# Altium PCB 驱动.PcbDoc (part 1 of 3)
Units mm, origin at the board's own origin, x right, y up, seen from the top; angles counter-clockwise.
Board outline 185 x 120 mm, 2 copper layers (Top Layer, Bottom Layer); 132 components, 68 nets, 349 pads, 106 vias.
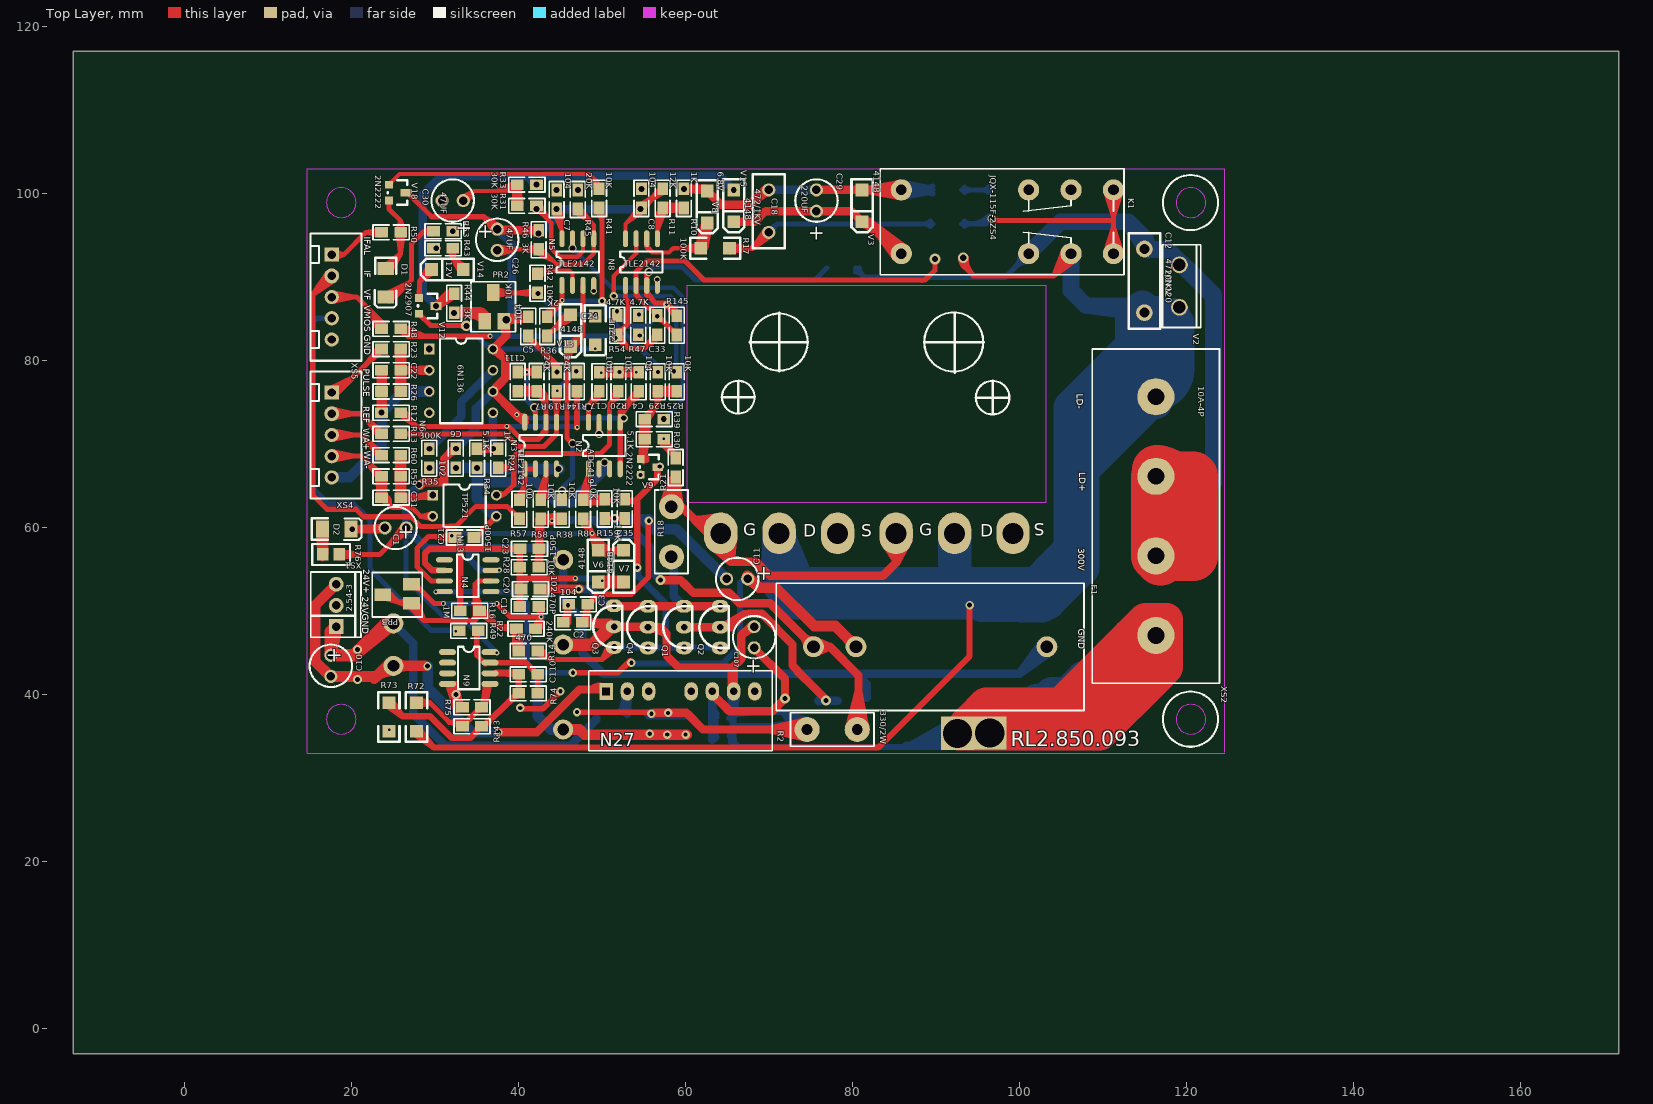
[diagram p0: Top Layer view]
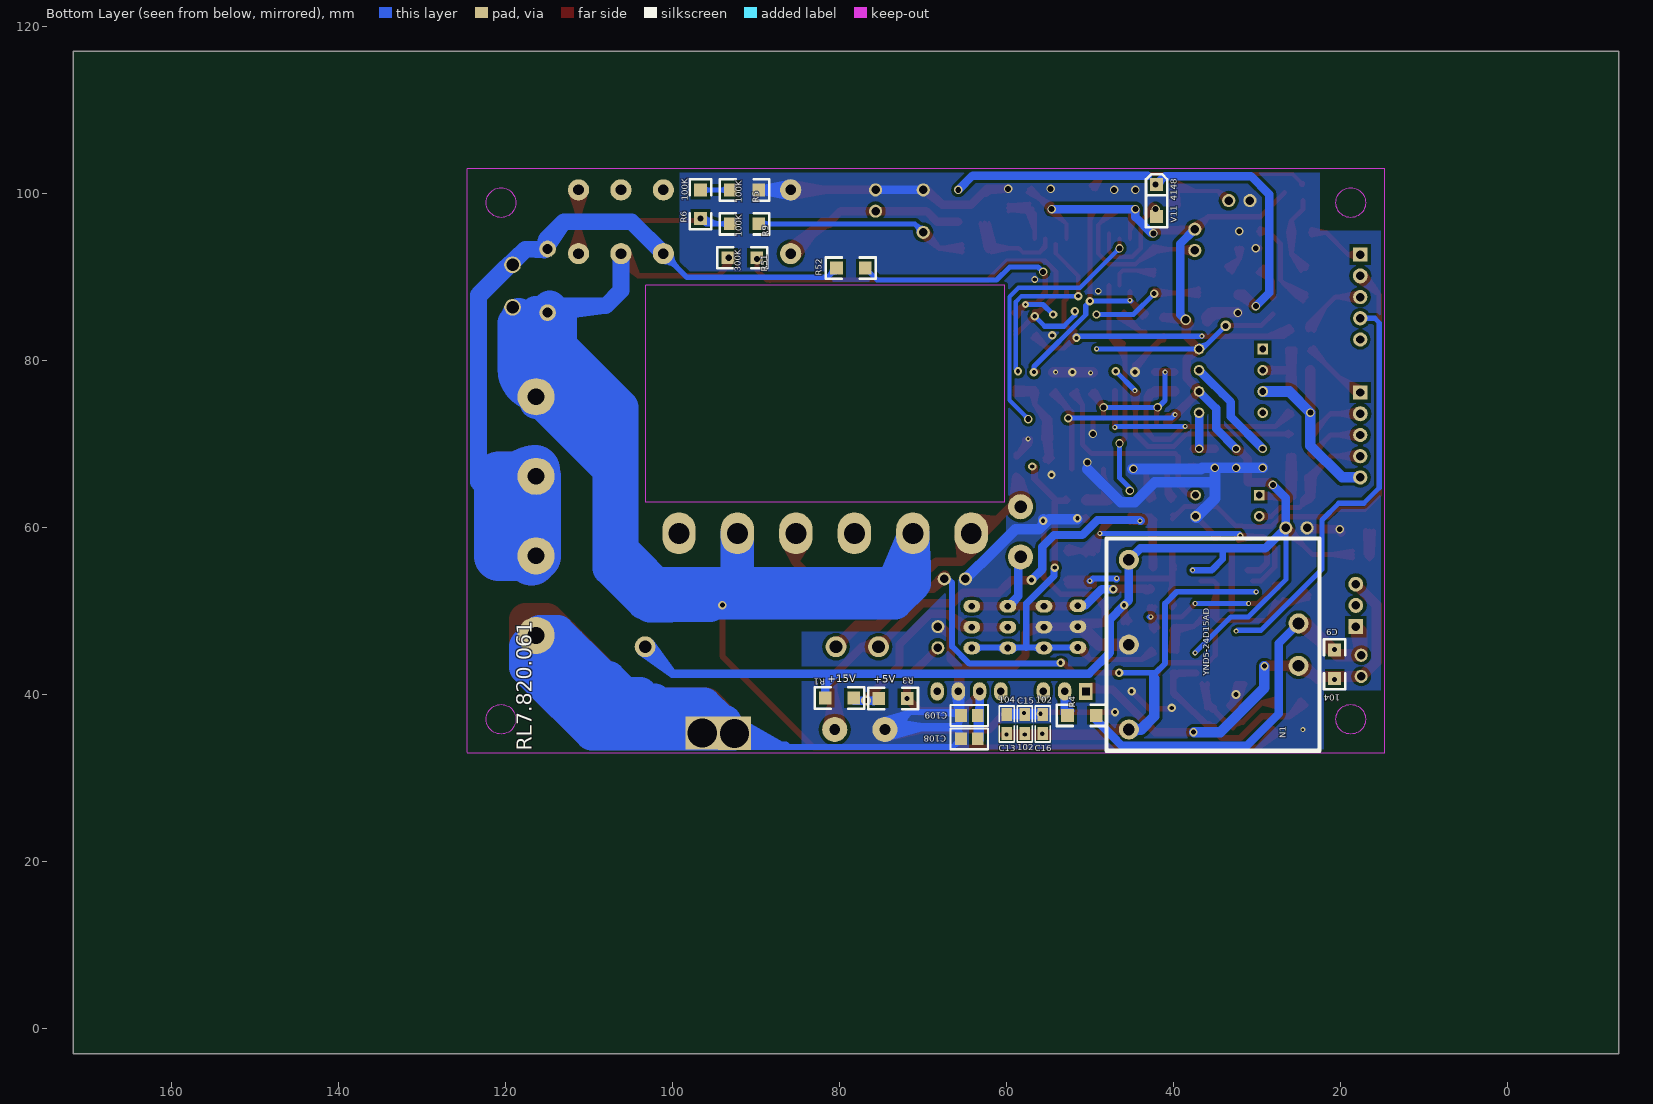
[diagram p1: Bottom Layer view, seen from below]

## Layer stack, top to bottom
Top Layer: signal copper 0.0356
Dielectric: dielectric 0.32, FR-4, Dk 4.8
Bottom Layer: signal copper 0.0356

## Board outline
-13.3,117 -13.3,-3 171.7,-3 171.7,117 -13.3,117

## Design rules (kind name [scope] priority, off if disabled: settings)
Clearance Clearance_1 [All vs (InPolygon)] p1: gap=0.381
Clearance [All] p2: gap=0.254
ComponentClearance [All] p1: gap=0 collisioncheckmode=3 verticalgap=0 showdistances=FALSE
FabricationTestPointUsage TestPointUsage [All] p1: valid=0 allowmultiple=FALSE
FabricationTestpoint Testpoint [All] p1: side=3 testpointundercomponent=TRUE minsize=1.016 maxsize=2.54 preferedsize=1.524 minholesize=0 maxholesize=1.016 preferedholesize=0.813 testpointgrid=0.025 allowsidetop=TRUE allowsidebottom=TRUE usegrid=TRUE gridtolerance=0
Height [All] p1: minheight=0 maxheight=100 prefheight=12.7
HoleSize [All] p1: absolutevalues=TRUE maxlimit=10 minlimit=0.025 maxpercent=80.000 minpercent=20.000
MinimumSolderMaskSliver [All] p1: minsoldermaskwidth=0
PolygonConnect [All] p1: connectstyle=Direct reliefconductorwidth=0.254 reliefentries=4 polygonreliefangle="90 Angle"
RoutingVias [All] p1: holewidth=0.711 width=1.016 viastyle="Through Hole" minholewidth=0.381 minwidth=0.508 maxholewidth=1.27 maxwidth=1.27
SilkToSilkClearance [All] p1: silktosilkclearance=0
SilkscreenOverComponentPads [All] p1: minsilkscreentomaskgap=0
SolderMaskExpansion [All] p1: expansion=0.102
Width [All] p1: maxlimit=25.4 minlimit=0.254 preferedwidth=25.4
20 further rules are at their usual default settings.

## Components (designator, comment, footprint, x,y, rotation, side; value= is the part's Value field where it differs from the comment)
C1 "100UF" RB.1/.2 26.543,59.944 r0 top
C2 "104" 0805A 45.339,48.641 r0 top
C3 "104" 0805A 45.989,50.792 r0 top
C4 "104" 0805A 54.367,76.3 r90 top
C5 "104" 0805A 41.148,85.217 r270 top
C6 "102" 0805A 32.485,69.427 r270 top
C7 "104" 0805A 44.55,98.129 r90 top
C8 "104" 0805A 54.71,98.256 r90 top
C9 "104" 1206#1 20.701,45.339 r270 bottom
C10 "47UF/35V" RB.1/.2 17.526,44.704 r90 top
C11 "100UF" RB.1/.2 64.897,53.848 r180 top
C12 "472/1KV" RAD0.3 114.935,93.345 r270 top
C13 "104" 0805A 59.962,37.621 r270 bottom
C15 "102" 0805A 57.803,37.621 r270 bottom
C16 "102" 0805A 55.644,37.621 r270 bottom
C17 "10U" 0805A 49.668,76.3 r90 top
C18 "472/1KV" RAD0.2 69.95,95.335 r90 top
C19 "470P" 0805A 42.418,50.546 r180 top
C20 "102" 0805A 42.568,52.632 r180 top
C21 "1500P" 0805A 32.385,58.801 r0 top
C22 "102" 0805A 23.595,78.825 r0 top
C23 "150P" 0805A 42.441,57.458 r180 top
C24 "22UF" 1206#2 50.546,80.518 r90 top
C26 "47UF" RB.1/.2 37.438,95.716 r90 top
C29 "220UF" RB.1/.2 75.665,97.875 r270 top
C30 "47UF" RB.1/.2 33.374,99.145 r0 top
C31 "103" 0805A 23.595,63.585 r0 top
C33 "102" 0805A 56.62,85.371 r270 top
C35 "100P" 0805A 52.705,61.087 r90 top
C107 "100UF" RB.1/.2 68.199,45.593 r270 top
C108 "102" 0805 63.427,34.695 r0 bottom
C109 "104" 0805 63.427,37.489 r0 bottom
C110 "102" 0805A 40.005,42.418 r0 top
C111 "104" 0805A 39.878,76.327 r90 top
D1 "LED" 1206A 24.103,91.017 r270 top
D2 "LED" 1206a 16.51,59.817 r0 top
F1 "2000/1" IF-1 89.281,57.15 r0 top
K1 "JQX-115F-2ZS4" JQX-115F 85.825,100.415 r0 top
N1 "YND5-24D15AD" YND5-D 25.019,48.514 r0 bottom
N2 "ADG419" SO-8#1 48.36,67.014 r90 top
N3 "TLE2142" SO-8#1 40.74,67.014 r90 top
N4 "TLE2141" SO-8#1 31.115,56.134 r0 top
N5 "TLE2142" SO-8#1 45.185,88.985 r90 top
N6 "6N136" DIP8 29.31,81.365 r0 top
N8 "TLE2142" SO-8#1 52.805,88.985 r90 top
N9 "TLE2142" SO-8#2 31.496,45.085 r0 top
N13 "TP521" DIP4 29.718,63.881 r0 top
N27 "WRB2405S" WRB2405S 48.387,33.274 r0 top
PR2 "10K" 3224#1 36.957,88.138 r180 top
PR3 "500K" 3224#2 23.749,51.943 r270 top
Q1 "2C2236" TO-92_2 59.817,48.071 r90 top
Q2 "2C2236" TO-92_2 64.135,48.071 r90 top
Q3 "A966" TO-92_2 51.435,48.133 r90 top
Q4 "A966" TO-92_2 55.499,48.071 r90 top
R1 "0Ω" 1206#2 83.058,38.227 r180 bottom
R2 "330/2W" 2W#1 74.549,35.814 r0 top
R3 "0Ω" 1206#2 70.485,40.894 r0 bottom
R4 "0Ω" 1206#2 47.879,38.862 r0 bottom
R5 "100K" 1206#1 89.635,100.415 r0 bottom
R6 "100K" 1206#1 96.62,100.415 r270 bottom
R7 "24K" 0805A 42.164,78.613 r270 top
R8 "10K" 0805A 47.725,61.045 r90 top
R9 "100K" 1206#1 89.635,96.351 r0 bottom
R10 "1K" 0805A 59.79,98.256 r90 top
R11 "12K" 0805A 57.25,98.256 r90 top
R12 "10K" 0805A 25.881,73.745 r180 top
R13 "10K" 0805A 25.881,71.205 r180 top
R14 "470" 0805A 42.291,45.212 r180 top
R15 "10K" 0805A 50.292,61.087 r90 top
R16 "1M" 0805A 35.306,50.038 r180 top
R17 "100K" 1206#1 61.822,93.43 r0 top
R18 "10/2W" 2W#2 58.293,62.484 r270 top
R19 "24K" 0805A 44.577,76.327 r90 top
R20 "10K" 0805A 51.954,78.586 r270 top
R21 "4.7K" 0805A 58.801,66.04 r90 top
R22 "240K" 0805A 39.751,47.879 r0 top
R23 "100" 0805A 25.881,81.365 r180 top
R24 "1K" 0805A 37.565,69.427 r270 top
R25 "10K" 0805A 58.939,78.586 r270 top
R26 "10K" 0805A 23.595,76.285 r0 top
R28 "10K" 0805A 42.418,55.245 r180 top
R29 "10K" 0805A 56.653,76.3 r90 top
R30 "5.1K" 0805A 55.091,70.57 r0 top
R31 "30K" 0805A 42.137,98.51 r180 top
R33 "30K" 0805A 39.851,101.05 r0 top
R34 "5.1K" 0805A 35.025,67.141 r90 top
R35 "300K" 0805A 29.31,67.141 r90 top
R36 "2K" 0805A 43.434,82.931 r90 top
R38 "10K" 0805A 45.185,63.331 r270 top
R39 "10K" 0805A 57.377,72.983 r180 top
R41 "10K" 0805A 49.63,100.542 r270 top
R42 "10K" 0805A 42.264,90.382 r270 top
R43 "300" 0805A 29.818,93.43 r0 top
R44 "3K" 0805A 32.274,87.985 r270 top
R45 "20K" 0805A 47.09,100.415 r270 top
R46 "3K" 0805A 42.391,95.589 r270 top
R47 "4.7K" 0805A 54.334,85.371 r270 top
R48 "100" 0805A 23.595,83.778 r0 top
R49 "100" 0805A 32.893,47.625 r0 top
R50 "510" 0805A 25.881,95.335 r180 top
R51 "300K" 1206#1 89.889,92.287 r0 bottom
R52 "300K" 1206#2 75.538,92.414 r0 bottom
R53 "3K" 0805A 32.104,95.462 r180 top
R54 "4.7K" 0805A 51.794,85.371 r270 top
R57 "100" 0805A 40.105,61.045 r90 top
R58 "10K" 0805A 42.645,63.331 r270 top
R59 "3K" 0805A 25.881,66.125 r180 top
R60 "510" 0805A 23.595,68.665 r0 top
R72 "300K" 1206#2 26.416,40.386 r270 top
R73 "300K" 1206#2 23.114,40.386 r270 top
R74 "30K" 0805A 40.005,40.132 r0 top
R75 "30K" 0805A 33.274,38.481 r0 top
R76 "2K" 0805 18.542,56.769 r180 top
R143 "10K" 0805A 33.274,36.195 r0 top
R144 "10K" 0805A 46.99,76.327 r90 top
R145 "10K" 0805A 58.928,85.344 r270 top
V2 "10N120" TO220D1 119.126,86.36 r270 top
V3 "4148" 1206-D 81.126,96.605 r270 top
V6 "4148" 1206-D 49.53,53.467 r270 top
V7 "4148" 1206-D 52.578,57.277 r90 top
V8 "6.8V" 1206-D 62.584,96.478 r270 top
V9 "2N2222" SOT-23 54.61,68.199 r270 top
V11 "4148" 1206-D 42.01,101.05 r90 bottom
V12 "2N2907" SOT-23 28.083,87.477 r270 top
V13 "4148" 1206-D 46.228,81.661 r270 top
V14 "12V" 1206-D 29.564,90.89 r180 top
V15 "4148" 1206-D 65.759,96.605 r270 top
V18 "2N2222" SOT-23 24.484,101.05 r270 top
XS1 "2.54-3" SIP3 18.161,48.133 r90 top
XS2 "10A-4P" XS10A-4P 116.305,75.65 r180 top
XS4 "Header 5" SIP-5 17.626,76.158 r270 top
XS5 "CON5" SIP-5 17.626,92.668 r270 top locked

## Footprints (in the part's own frame and the unit in brackets; to place one, negate y for a bottom-side part, rotate by r counter-clockwise, add the part's x,y. Pads: shape width x height; smd on the part's side, far side on the other; paste and mask are expansions set on the pad)
2W#1 [mm]
  round 3 hole 1.3: 0(0,0) 1(6,0)
  silkscreen extent -2,-2 8,2
2W#2 [mm]
  round 3 hole 1.5: 0(0,0) 1(6,0)
  silkscreen extent -2,-2 8,2
0805 [mm]
  rect 1.4x1.5 smd: 1(0,0) 2(2,0)
  silkscreen extent -1.25,-1.25 3.25,1.25
0805A [mil]
  rect 60x50 smd: 1(0,0) 2(90,0)
  silkscreen extent -40,-35 130,35
1206#1 [mil]
  rect 60x60 smd: 1(0,0) 2(135,0)
  silkscreen extent -50,-50 185,50
1206#2 [mil]
  rect 60x60 smd: 1(53.76,53.48) 2(188.76,53.48)
  silkscreen extent 4,3 239,103
1206-D [mm]
  rect 1.54x1.54 smd: A(-3.81,0) K(0,0)
  silkscreen extent -5.08,-1.27 1.27,1.27
1206A [mil]
  rect 60x78.74 smd: 1(0,0) 2(135,0)
  silkscreen extent -50,-52 184,50
1206a [mil]
  rect 60x78.74 smd: 1(0,0) 2(135,0)
  silkscreen extent -50,-52 184,50
3224#1 [mm]
  rect 1.5x2 smd: 1(1.016,3.429) 2(-1.27,3.429) W(0,0)
  silkscreen extent -2.67,-1.27 2.67,4.7
3224#2 [mm]
  rect 1.5x2 smd: 1(-1.27,3.429) 2(1.016,3.429) W(0,0)
  silkscreen extent -2.67,-1.27 2.67,4.7
DIP4 [mil]
  rect 50x50 hole 32: A(0,0)
  round 50 hole 32: C(300,0) E(300,-100) K(0,-100)
  silkscreen extent 50,-150 250,50
DIP8 [mil]
  rect 50x50 hole 32: 1(0,0)
  round 50 hole 32: 2(0,-100) 3(0,-200) 4(0,-300) 5(300,-300) 6(300,-200) 7(300,-100) 8(300,0)
  silkscreen extent 50,-350 250,50
IF-1 [mm]
  round 2.5 hole 1.524: 3(13.97,-11.43) 4(-13.97,-11.43) 5(-8.89,-11.43)
  silkscreen extent -18.41,-19.05 18.41,-3.81
JQX-115F [mm]
  round 2.54 hole 1.27: 0(15.24,0) 0(20.32,0) 0(25.4,-7.62) 1(20.32,-7.62) 2(25.4,0) 3(15.24,-7.62) 4(0,0) 5(0,-7.62)
  silkscreen extent -2.54,-10.16 26.67,2.54
RAD0.2 [mil]
  round 62 hole 40: 1(0,0) 2(200,0)
  silkscreen extent -75,-75 275,75
RAD0.3 [mm]
  round 2 hole 1.2: 1(0,0) 2(7.62,0)
  silkscreen extent -1.91,-1.91 9.53,1.91
RB.1/.2 [mil]
  round 62 hole 40: 1(0,0) 2(-100,0)
  silkscreen extent -150,-100 50,100
SIP3 [mil]
  rect 70x70 hole 40: 1(0,0)
  round 70 hole 40: 2(100,0) 3(200,0)
  silkscreen extent -50,-117 257,120
SIP-5 [mm]
  rect 1.7x1.7 hole 1: 1(0,0)
  round 1.8 hole 1: 2(2.54,0)
  round 1.7 hole 1: 3(5.08,0) 4(7.62,0) 5(10.16,0)
  silkscreen extent -2.54,-2.54 12.7,3.56
SO-8#1 [mil]
  oval 80x24 smd: 1(0,0) 2(0,-50) 3(0,-100) 4(0,-150) 5(220,-150) 6(220,-100) 7(220,-50) 8(220,0)
  silkscreen extent 60,-175 160,25
SO-8#2 [mil]
  oval 80x28 smd: 1(0,0) 2(0,-50) 3(0,-100) 4(0,-150) 5(200,-150) 6(200,-100) 7(200,-50) 8(200,0)
  silkscreen extent 50,-175 150,25
SOT-23 [mil]
  rect 36x36 smd: B(0,0) E(75,0)
  rect 36x50 smd: C(38,80)
  silkscreen extent -20,-5 95,85
TO220D1 [mm]
  round 2 hole 1.5: A(0,0) K(-5.08,0)
  silkscreen extent -7.49,-2.03 2.41,2.54
TO-92_2 [mm]
  oval 1.5x2 hole 0.8: 1(0,0) 2(-2.5,0) 3(2.5,0)
  silkscreen extent -2.5,-1 2.5,2.5
WRB2405S [mm]
  rect 1.6x2 hole 0.9 square: 1(2.1,7.1)
  oval 1.6x2.2 hole 0.9: 2(4.64,7.1) 3(7.18,7.1) 5(12.28,7.1) 6(14.82,7.1) 7(17.36,7.1) 8(19.89,7.1)
  silkscreen extent -0.01,0 21.99,9.6
XS10A-4P [mm]
  round 4.445 hole 2: 1(0,0) 2(0,9.525) 3(0,19.05) 4(0,28.575)
  silkscreen extent -7.62,-5.72 7.62,34.29
YND5-D [mm]
  round 2.4 hole 1.4: 1(0,0) 2(0,5.08) 3(20.32,12.7) 4(20.32,2.54) 5(20.32,-7.62)
  silkscreen extent -2.5,-10.17 23,15.23

## Part data
C1 C10 C11 C24 C26 C29 C30 C107: library part ELECTRO1
C2 C3 C4 C5 C6 C7 C8 C9 C12 C13 C15 C16 C17 C18 C19 C20 C21 C22 C23 C31 C33 C35 C108 C109 C110 C111: library part CAP
F1: library part IF-1
K1: library part RELAY-SPDT
N1: library part YND5
N3 N5 N8 N9: library part LM193
N4: library part TLC2241
N6: library part 6N137
N13: library part OPTOISO1
PR2 PR3: library part POT
Q1 Q2: library part 2N3904, "NPN General Purpose Amplifier"
Q3 Q4: library part 2N3906, "PNP General Purpose Amplifier"
R1 R2 R3 R4 R5 R6 R7 R8 R9 R10 R11 R12 R13 R14 R15 R16 R17 R18 R19 R20 R21 R22 R23 R24 R25 R26 R28 R29 R30 R31 R33 R34 R35 R36 R38 R39 R41 R42 R43 R44 R45 R46 R47 R48 R49 R50 R51 R52 R53 R54 R57 R58 R59 R60 R72 R73 R74 R75 R76 R143 R144 R145: library part RES2
V2 V3 V6 V7 V11 V13 V15: library part DIODE
V8 V14: library part "DIODE SCHOTTKY"
V9 V18: library part NPN1
V12: library part PNP2
XS1: library part CON3
XS2: library part CON4
XS4: "Header, 5-Pin"
XS5: "Connector"

## Free pads (board coordinates)
  rect 4x4 hole 3.5: 0(96.4,35.4) 1(92.55,35.35)
  oval 4x5 hole 2.5: 4(64.2,59.3) 5(71.2,59.3) 6(78.2,59.3) 7(85.2,59.3) 8(92.2,59.3) 9(99.2,59.3)

## Via types
v1: diameter 1.016, hole 0.711, Top Layer to Bottom Layer, 31 vias
v2: diameter 1, hole 0.5, Top Layer to Bottom Layer, 28 vias
v3: diameter 0.6, hole 0.3, Top Layer to Bottom Layer, 23 vias
v4: diameter 1, hole 0.6, Top Layer to Bottom Layer, 5 vias
v5: diameter 1.016, hole 0.635, Top Layer to Bottom Layer, 4 vias
v6: diameter 1.2, hole 0.6, Top Layer to Bottom Layer, 4 vias
v7: diameter 1.1, hole 0.6, Top Layer to Bottom Layer, 3 vias
v8: diameter 0.8, hole 0.4, Top Layer to Bottom Layer, 2 vias
v9: diameter 1.27, hole 0.762, Top Layer to Bottom Layer, 2 vias
v10: diameter 0.8, hole 0.5, Top Layer to Bottom Layer, 2 vias
v11: diameter 1.27, hole 0.889, Top Layer to Bottom Layer, 1 vias
v12: diameter 1.27, hole 0.711, Top Layer to Bottom Layer, 1 vias

## Nets (pads, with @x,y where several pads share a name; then routed paths per layer and width w, separated by ;. In a path a pad name is that pad's centre, name@x,y a point inside that pad or via, vN(x,y) a via of type N, cw(c..) or ccw(c..) an arc to the next point about the centre after c; other vN are vias at no path point)
24V: C9.1 C10.1 N1.1 R4.1 XS1.1 | length 68.4
  Top Layer w1.5: XS1.1@18.161,48.133 C10.1@17.526,44.704 ; XS1.1@18.2,48.2 17.526,47.526 C10.1@17.526,44.704 ; N1.1@25.019,48.514 20.304,44.704 ; N1.1@25.2,48.5 24.1,48.5 20.304,44.704 ; C10.1@17.526,44.704 20.304,44.704 ; 17.526,46.264 cw(c20.03,46.264) 18.259,48.035 ccw(c20.03,46.264) 17.526,46.264 ; 22.706,47.106 cw(c25.019,44.793) 25.019,48.064 ccw(c25.019,44.793) 22.706,47.106
  Bottom Layer w1: N1.1@25.019,48.514 27.4,46.133 27.4,37.695 31.236,33.86 46.148,33.86 47.293,35.005 47.305,35.005 49.3,37 R4.1@49.3,37.2
  other v7: 20.7,45.4
24V-: C9.2 C10.2 N1.2 N27.1 XS1.3 | length 74.2
  Top Layer w0.8: 48.7,40.6 cw(c49.746,39.554) N27.1@49.746,41.033 ; 49.459,40.6 cw(c49.459,39.546) N27.1@50.204,40.291 ; 49.5,40.6 50.1,40.6 N27.1@50.4,40.3 ; 49.584,40.6 ccw(c49.584,41.477) N27.1@50.204,40.857
  Top Layer w1: v4(37.6,35.5) 42.2,35.5 47.3,40.6 49.5,40.6
  Top Layer w1.27: C10.2@17.5,42.1 15.658,43.942 ; N1.2@25.6,43.6 24.4,43.6 22.964,42.164 ; v4@28.766,43.434 N1.2@25.019,43.434 22.964,42.164 ; 15.658,43.942 15.658,50.71 ; 15.658,43.942 C10.2@17.526,42.164 22.964,42.164 ; 15.658,50.71 XS1.3@18.161,53.213 15.658,50.71 ; 26.383,43.434 cw(c26.383,44.798) 25.419,43.834 ccw(c26.383,44.798) 26.383,43.434 ; 26.383,43.434 ccw(c26.383,42.07) 25.419,43.034 cw(c26.383,42.07) 26.383,43.434 ; 22.714,41.914 cw(c25.019,39.61) 25.019,42.869 ccw(c25.019,39.61) 22.714,41.914
  Bottom Layer w1.27: v4(29.1,43.4) 29.1,40.8 34.4,35.5 v4@37.5,35.5
  other v7: 20.7,41.8
300V: C12.1 K1.3 R52.2 V2.K XS2.2 XS2.3 | length 487.9
  Top Layer w6: XS2.3@116.305,56.6 120.75,66.125 ; XS2.3@116.305,56.6 120.75,56.6 ; XS2.3@116.305,56.6 120.75,56.6 ; XS2.3@116.305,56.6 XS2.2@116.94,66.125 ; XS2.3@116.305,56.6 XS2.2@116.305,66.125 ; XS2.3@116.305,56.6 XS2.2@116.305,66.125 ; XS2.2@116.305,66.125 120.75,66.125 ; XS2.2@116.305,66.125 120.75,56.6 ; XS2.2@116.305,66.125 XS2.3@116.94,56.6 ; XS2.2@116.305,66.125 120.75,66.125 ; XS2.2@116.305,66.125 120.75,66.125 ; XS2.3@116.855,56.05 ccw(c107.451,65.454) 120.75,65.454 ; XS2.3@116.855,56.05 ccw(c107.451,65.454) 120.75,65.454 ; XS2.3@116.855,56.05 ccw(c107.451,65.454) 120.75,65.454 ; XS2.2@116.855,66.675 cw(c107.451,57.271) 120.75,57.271 ; XS2.2@116.855,66.675 cw(c107.451,57.271) 120.75,57.271 ; XS2.2@116.855,66.675 cw(c107.451,57.271) 120.75,57.271 ; XS2.3@116.94,56.6 120.75,56.6 ; XS2.3@116.94,56.6 XS2.2@116.94,66.125 ; XS2.2@116.94,66.125 120.75,66.125 ; 120.75,56.6 120.75,66.125 ; XS2.2@116.453,66.888 cw(c115.445,61.68) 120.75,61.68 ccw(c115.445,61.68) XS2.2@116.453,66.888
  Bottom Layer w0.635: R52.2@80.332,91.056 81.438,89.95 98.22,89.95 K1.3@101.065,92.795 ; R52.2@80.332,90.611 cw(c80.332,89.538) R52.2@81.091,90.297 ; R52.2@80.332,90.611 cw(c80.332,89.538) R52.2@81.091,90.297 ; R52.2@80.332,90.611 cw(c80.332,89.538) R52.2@81.091,90.297 ; R52.2@80.777,91.056 ccw(c81.85,91.056) R52.2@81.091,90.297 ; R52.2@80.777,91.056 ccw(c81.85,91.056) R52.2@81.091,90.297 ; R52.2@80.777,91.056 ccw(c81.85,91.056) R52.2@81.091,90.297 ; 99.439,91.169 cw(c101.065,89.543) K1.3@101.065,91.842 ; 99.439,91.169 ccw(c97.813,92.795) K1.3@100.113,92.795 ; 99.439,91.169 cw(c101.065,89.543) K1.3@101.065,91.842 ; 99.439,91.169 ccw(c97.813,92.795) K1.3@100.113,92.795 ; 99.439,91.169 ccw(c97.813,92.795) K1.3@100.113,92.795 ; 99.439,91.169 cw(c101.065,89.543) K1.3@101.065,91.842
  Bottom Layer w2: K1.3@101.065,92.795 104.875,96.605 113.003,96.605 ; 120.75,62.95 123.2,65.4 123.2,87.874 119.888,91.186 117.6,93.3 ; 123.163,87.737 117.6,93.3 ; 113.003,96.605 115.1,94.508 ; 113.003,96.605 C12.1@115.316,93.218 ; 115.1,94.508 115.1,93.3 117.6,93.3 ; 115.1,94.508 C12.1@115.316,93.218 ; 115.1,94.508 C12.1@115.316,93.218 ; C12.1@115.316,93.218 ccw(c112.723,93.218) 114.557,95.051 cw(c112.723,93.218) C12.1@115.316,93.218 ; C12.1@115.316,93.218 ccw(c112.745,93.227) 114.563,95.045 cw(c112.745,93.227) C12.1@115.316,93.218 ; C12.1@115.316,93.218 117.6,93.3
  Bottom Layer w6: XS2.3@116.305,56.6 120.75,66.125 ; XS2.3@116.305,56.6 120.75,56.6 ; XS2.3@116.305,56.6 120.75,56.6 ; XS2.3@116.305,56.6 XS2.2@116.94,66.125 ; XS2.3@116.305,56.6 XS2.2@116.305,66.125 ; XS2.3@116.305,56.6 XS2.2@116.305,66.125 ; XS2.2@116.305,66.125 120.75,66.125 ; XS2.2@116.305,66.125 120.75,56.6 ; XS2.2@116.305,66.125 XS2.3@116.94,56.6 ; XS2.2@116.305,66.125 120.75,66.125 ; XS2.2@116.305,66.125 120.75,66.125 ; XS2.3@116.855,56.05 ccw(c107.451,65.454) 120.75,65.454 ; XS2.3@116.855,56.05 ccw(c107.451,65.454) 120.75,65.454 ; XS2.3@116.855,56.05 ccw(c107.451,65.454) 120.75,65.454 ; XS2.2@116.855,66.675 cw(c107.451,57.271) 120.75,57.271 ; XS2.2@116.855,66.675 cw(c107.451,57.271) 120.75,57.271 ; XS2.2@116.855,66.675 cw(c107.451,57.271) 120.75,57.271 ; XS2.3@116.94,56.6 120.75,56.6 ; XS2.3@116.94,56.6 XS2.2@116.94,66.125 ; XS2.2@116.94,66.125 120.75,66.125 ; 120.75,56.6 120.75,66.125 ; XS2.2@116.453,66.888 cw(c115.445,61.68) 120.75,61.68 ccw(c115.445,61.68) XS2.2@116.453,66.888
+5V: C107.1 C108.1 C109.1 N27.6 R3.1 | length 46.3
  Top Layer w1: N27.6@63.207,40.074 65.281,38 70.4,38 v6@71.8,39.4 ; N27.6@63.207,40.374 63.207,39.993 65,38.2 ; C107.1@68.199,45.593 71.9,41.892 v6(71.9,39.5)
  Bottom Layer w1.016: 63.207,36.226 N27.6@63.207,40.074 ; N27.6@63.207,40.374 63.207,34.593 63.427,37.439 63.427,34.745 63.207,38.514 C109.1@63.427,37.539 ; 63.207,35.74 ccw(c64.422,35.74) 63.563,34.881 cw(c64.422,35.74) 63.207,35.74 ; 63.207,36.444 cw(c64.422,36.444) 63.563,37.303 ccw(c64.422,36.444) 63.207,36.444 ; 63.207,38.534 ccw(c64.422,38.534) 63.563,37.675 cw(c64.422,38.534) 63.207,38.534
DGND: C22.1 N6.3 R12.2 R26.1 XS4.5 | length 44
  Top Layer w1.27: C22.1@23.595,78.19 v1(23.595,73.745) ; v1(23.595,73.745) C22.1@23.595,78.825 23.595,74.38 R26.1@23.595,76.285 ; v1(23.595,73.745) R26.1@23.595,76.285 ; v1(23.595,73.745) R26.1@23.595,76.285
  Bottom Layer w1.27: XS4.5@17.626,65.998 19.785,65.998 ; XS4.5@18.134,65.998 19.785,65.998 ; 19.785,65.998 23.595,69.808 v1(23.595,73.745) 26.135,76.285 ; 26.135,76.285 N6.3@29.31,76.285 26.135,76.285
GND: C1.2 C2.2 C3.2 C4.2 C5.2 C6.2 C7.2 C8.2 C11.1 C13.1 C15.1 C16.1 C17.2 C18.2 C21.2 C29.2 C30.2 C35.1 C107.2 C108.2 C109.2 D2.2 K1.4 N1.4 N2.2 N2.3 N2.7 N3.4 N5.4 N8.4 N9.4 N13.E N27.7 pad.0 pad.1 PR2.1 Q3.1 Q4.1 R2.0 R5.1 R10.2 R15.1 R19.2 R20.1 R21.2 R30.2 R34.1 R35.1 R43.1 R44.2 R45.1 R47.2 R53.1 R73.2 R75.1 V3.A V8.A V9.E XS2.4 | length 1521.8
  Top Layer w0.61: N2.7@49.63,71.891 v1(49.63,71.205) N2.7@49.63,72.602
  Top Layer w0.67: C21.2@34.7,58.9 34.897,58.9 N13.E@37.338,61.341 ; C21.2@34.798,58.801 36.809,60.812 ; v2@40.1,38.3 42.9,38.3 v2(45,40.4) ; C5.2@41.148,82.804 43.204,80.875 ; C5.2@41.148,82.931 44.6,79.479 ; 42.719,81.36 R19.2@44.577,78.74 ; R19.2@44.6,78.7 44.6,79.479 ; v2(47,37.9) 55.7,37.9 v2(55.9,37.7) ; C2.2@47.54,48.853 ccw(c45.765,50.628) C3.2@48.275,50.628 ; C2.2@47.752,48.641 C3.2@48.275,50.792 ; C2.2@47.8,48.8 48.275,49.275 C3.2@48.275,50.792 ; C2.2@48.014,48.379 ccw(c47.383,49.01) C2.2@48.275,49.01 ; C3.2@48.063,50.58 cw(c47.551,50.068) 48.275,50.068 cw(c48.999,50.068) C3.2@48.487,50.58 ; C3.2@48.402,50.792 49.469,51.986 ; C3.2@48.702,50.792 cw(c49.733,50.792) 49.004,51.521 ; R15.1@50.292,61.087 C35.1@52.705,61.087 C35.1@52.713,61.087 ; R15.1@50.5,60.9 R15.1@50.647,60.9 ; R15.1@50.504,60.875 cw(c51.016,60.363) 51.016,61.087 cw(c51.016,61.811) R15.1@50.504,61.299 ; C35.1@52.493,60.875 ccw(c51.981,60.363) 51.981,61.087 ccw(c51.981,61.811) C35.1@52.493,61.299 ; v2@55.6,60.9 55.5,60.8 55.5,54.016 53.47,51.986 49.469,51.986 ; R30.2@57.142,70.647 ccw(c58.037,70.457) 57.39,69.81 ; R30.2@57.165,70.358 cw(c56.653,69.846) 57.377,69.846 cw(c58.101,69.846) R30.2@57.589,70.358 ; 57.377,69.812 cw(c57.963,69.812) R30.2@57.659,70.313 ; R30.2@57.797,70.508 ccw(c59.477,70.151) R21.2@58.263,68.937 ; R21.2@58.197,69.003 ccw(c58.801,69.608) R21.2@58.801,68.753 ; C107.2@68.033,47.967 C107.2@68.199,48.133 ; C21.2@35.31,59.313 cw(c34.798,59.825) 34.798,59.101 ccw(c34.798,59.825) C21.2@35.31,59.313 ; C21.2@35.31,59.313 ccw(c35.822,58.801) 35.098,58.801 cw(c35.822,58.801) C21.2@35.31,59.313 ; 36.826,60.829 cw(c37.338,60.317) 37.338,61.041 ccw(c37.338,60.317) 36.826,60.829 ; 36.826,60.829 ccw(c36.314,61.341) 37.038,61.341 cw(c36.314,61.341) 36.826,60.829 ; N13.E@37.338,61.341 35.282,59.285 N13.E@37.338,61.341 ; R19.2@44.577,78.74 44.6,79.479 ; R19.2@44.577,78.74 44.6,79.479 ; 44.6,79.479 cw(c43.893,79.479) 44.373,78.96 ccw(c43.893,79.479) 44.6,79.479 ; C3.2@48.275,50.792 49.469,51.986 ; 57.377,69.823 R30.2@57.377,70.57 57.377,69.823 ; 57.377,69.823 58.7,68.5 57.504,70.57 58.801,68.453 57.377,69.823 ; C5.2@41.148,82.504 cw(c41.148,81.473) 41.877,82.202 ccw(c41.148,81.473) C5.2@41.148,82.504 ; 44.6,79.409 ccw(c45.246,79.409) 44.789,78.952 cw(c45.246,79.409) 44.6,79.409
  Top Layer w0.7: N9.4@31.592,40.976 R75.1@33.147,38.481 ; 32.475,38.125 N9.4@32.475,41.275 ; 32.475,38.125 32.5,38.1 R75.1@33.147,38.481 ; 32.475,38.125 R75.1@33.147,38.481 ; 32.475,38.125 R75.1@33.147,38.481 ; N9.4@32.475,41.275 N9.4@31.496,41.275 32.475,38.237 R75.1@33.147,38.481 ; N9.4@32.475,41.275 R75.1@33.147,38.481 ; N9.4@32.152,41.271 cw(c31.374,40.492) 32.475,40.492 ccw(c31.374,40.492) N9.4@32.152,41.271 ; 32.475,39.101 ccw(c33.767,39.101) 32.854,38.188 cw(c33.767,39.101) 32.475,39.101 ; 32.475,40.791 ccw(c35.457,40.791) 33.349,38.683 cw(c35.457,40.791) 32.475,40.791
  Top Layer w1: 49.374,48.633 cw(c49.374,46.322) Q3.1@51.008,47.956 ; Q3.1@51.435,48.133 Q3.1@51.467,48.133 ; Q3.1@51.498,48.133 55.249,48.071 51.685,48.133 Q4.1@55.435,48.133 ; Q3.1@51.5,48.1 Q3.1@51.467,48.133 ; 54.496,48.133 cw(c54.496,47.318) Q4.1@55.072,47.894 ; Q4.1@55.499,48.071 56.929,48.071 ; Q4.1@55.567,48.133 Q3.1@51.467,48.133 ; Q4.1@55.839,47.838 cw(c56.404,46.367) 57.519,47.481 ; v2@56.1,37.7 56.2,37.8 60.1,37.8 ; 60.2,37.7 62.086,35.814 R2.0@74.549,35.814 ; N27.7@65.5,40.6 65.5,43.2 59.2,43.2 57.7,44.7 57.7,47.3 ; 65.5,41.995 ccw(c67.068,41.995) N27.7@65.959,40.886 ; N27.7@65.747,40.674 65.747,43.3 65.7,43.3 66.658,44.258 66.658,47.058 ; 66.913,47.313 cw(c68.199,46.027) C107.2@68.199,47.846 ; C107.2@67.8,48.2 66.658,47.058 ; C107.2@68.199,48.133 66.658,47.058 ; R2.0@73.842,35.107 ccw(c72.135,33.4) 72.135,35.814 ccw(c72.135,38.228) R2.0@73.842,36.521 ; R2.0@74.438,34.82 70.049,35.814 R2.0@74.438,36.808 ; Q3.1@50.967,48.633 48.275,48.633 51.185,48.133 47.752,48.641 Q3.1@50.967,48.633 ; Q3.1@50.967,48.633 Q3.1@51.467,48.133 ; Q4.1@55.749,48.071 57.7,47.3 ; Q4.1@55.749,48.071 56.929,48.071 ; Q4.1@55.749,48.071 56.929,48.071 ; 56.929,48.071 57.7,47.3
  Top Layer w1.016: D2.2@19.912,59.394 19.912,59.412 20.1,59.6 v5(20.1,59.8) ; D2.2@19.939,59.817 23.983,59.817 C1.2@24,59.8 ; D2.2@20.161,59.817 C1.2@24.003,59.944 ; R43.1@29.818,93.43 30.13,93.43 v5(30.15,93.45) ; C29.2@75.665,100.415 K1.4@85.825,100.415 ; K1.4@85.758,99.656 81.507,100.415 K1.4@85.758,101.174 ; 61.338,100.542 cw(c61.338,99.042) V8.A@62.399,100.103 ; 61.338,100.542 cw(c61.338,99.042) V8.A@62.399,100.103 ; 61.338,100.542 cw(c61.338,99.042) V8.A@62.399,100.103 ; V8.A@62.584,100.288 64.235,98.637 67.664,98.637 ; V8.A@62.584,100.288 62.33,100.542 v1(59.79,100.542) V8.A@62.584,100.288 ; 67.664,98.637 69.442,100.415 C18.2@69.95,100.415 67.664,98.637 ; 68.606,99.579 cw(c69.95,98.235) C18.2@69.95,100.136 ; 68.606,99.579 cw(c69.95,98.235) C18.2@69.95,100.136 ; 68.606,99.579 cw(c69.95,98.235) C18.2@69.95,100.136 ; 83.985,100.415 cw(c83.985,98.575) K1.4@85.286,99.876 ; 83.985,100.415 ccw(c83.985,102.255) K1.4@85.286,100.954 ; 83.985,100.415 cw(c83.985,98.575) K1.4@85.286,99.876 ; 83.985,100.415 ccw(c83.985,102.255) K1.4@85.286,100.954 ; 83.985,100.415 ccw(c83.985,102.255) K1.4@85.286,100.954 ; 83.985,100.415 cw(c83.985,98.575) K1.4@85.286,99.876 ; 23.022,59.817 ccw(c23.022,60.925) 23.805,60.142 cw(c23.022,60.925) 23.022,59.817
  Top Layer w1.27: v1(32.274,85.699) 35.339,85.75 ; R44.2@32.325,85.75 35.339,85.75 ; 34.493,85.75 cw(c34.493,83.496) PR2.1@36.087,85.09 ; 35.157,85.75 cw(c35.157,84.781) PR2.1@36.061,85.13 ; PR2.1@35.941,84.709 PR2.1@35.962,84.709 ; C17.2@49.668,78.586 R20.1@51.954,78.586 ; C17.2@49.714,78.586 R20.1@51.954,78.586 ; C4.2@54.367,78.586 R20.1@51.954,78.586 ; 35.339,85.75 35.941,84.959 35.339,85.75 ; 33.754,85.75 cw(c33.754,82.772) 35.86,84.878 ccw(c33.754,82.772) 33.754,85.75
  Top Layer w1.5: N1.4@45.339,45.974 48.874,45.974 ; Q3.1@51.185,48.133 48.874,45.974 ; Q3.1@51.335,48 50.9,48 48.874,45.974
  Top Layer w4: 115.035,40.725 ccw(c111.153,44.607) XS2.4@116.104,46.979 ; XS2.4@116.305,46.44 116.305,44.82 ; pad.1@92.55,35.35 95.92,38.82 ; pad.1@92.55,35.35 pad.1@92.705,35.295 ; pad.1@92.55,35.35 106.551,35.295 pad.0@96.4,35.4 ; pad.1@92.55,35.35 pad.0@96.4,35.4 ; pad.1@92.55,35.35 pad.0@96.4,35.4 ; pad.1@92.55,35.35 pad.0@96.4,35.4 ; pad.1@92.705,35.295 106.78,35.295 ; pad.1@92.705,35.295 pad.0@96.4,35.4 ; pad.1@92.705,35.295 pad.0@96.4,35.4 ; 95.92,38.82 104.875,38.82 ; 95.92,38.82 pad.0@96.4,35.4 ; 95.92,38.82 pad.0@96.4,35.4 ; pad.0@96.4,35.4 cw(c104.657,27.143) 104.657,38.82 ; pad.0@96.4,35.4 cw(c104.657,27.143) 104.657,38.82 ; pad.0@96.4,35.4 cw(c104.657,27.143) 104.657,38.82 ; pad.0@96.4,35.4 104.875,38.82 ; pad.0@96.4,35.4 106.78,35.295 ; 104.875,38.82 113.13,47.075 ; 104.875,38.82 XS2.4@116.305,47.075 ; 106.78,35.295 109.606,35.295 116.305,41.995 ; 106.78,35.295 116.305,44.82 ; 106.78,35.295 XS2.4@116.305,47.075 ; 110.505,44.45 cw(c116.305,38.65) XS2.4@116.305,46.852 ; 110.505,44.45 cw(c116.305,38.65) XS2.4@116.305,46.852 ; 110.505,44.45 cw(c116.305,38.65) XS2.4@116.305,46.852 ; 112.673,45.348 cw(c116.305,41.716) XS2.4@116.305,46.852 ; 112.673,45.348 cw(c116.305,41.716) XS2.4@116.305,46.852 ; 112.673,45.348 cw(c116.305,41.716) XS2.4@116.305,46.852 ; 113.13,47.075 115.035,48.98 117.575,48.98 117.575,43.265 ; 113.13,47.075 XS2.4@114.4,47.075 ; 113.13,47.075 XS2.4@116.305,47.075 ; 113.13,47.075 XS2.4@116.305,47.075 ; 113.13,47.075 XS2.4@116.305,47.075 ; 114.331,42.846 ccw(c110.102,47.075) XS2.4@116.083,47.075 ; 114.331,42.846 ccw(c110.102,47.075) XS2.4@116.083,47.075 ; 114.331,42.846 ccw(c110.102,47.075) XS2.4@116.083,47.075 ; XS2.4@114.4,47.075 106.78,39.455 XS2.4@116.305,47.075 ; XS2.4@114.4,47.075 XS2.4@116.305,47.075 ; XS2.4@116.148,46.918 cw(c112.702,43.472) 117.575,43.472 ; XS2.4@116.148,46.918 cw(c112.702,43.472) 117.575,43.472 ; XS2.4@116.148,46.918 cw(c112.702,43.472) 117.575,43.472 ; 116.305,41.995 116.305,44.82 ; 116.305,41.995 117.575,43.265 ; 116.305,41.995 XS2.4@116.305,47.075 ; 116.305,41.995 XS2.4@116.305,47.075 ; 116.305,44.82 XS2.4@116.305,47.075 ; XS2.4@116.305,47.075 117.575,43.265 ; XS2.4@116.305,47.075 117.575,43.265 ; 111.543,45.488 cw(c115.146,41.884) 116.257,46.858 ccw(c115.146,41.884) 111.543,45.488
  Bottom Layer w0.61: K1.4@85.806,100.06 R5.1@89.004,100.065 ; K1.4@85.806,100.77 R5.1@89.004,100.765 ; K1.4@85.845,100.06 R5.1@88.924,100.415 ; K1.4@85.845,100.77 R5.1@88.924,100.415 ; K1.4@85.865,99.451 R5.1@89.004,100.065 ; K1.4@85.865,101.379 R5.1@89.004,100.765 ; K1.4@85.884,100.064 R5.1@89.004,100.765 ; K1.4@85.884,100.766 R5.1@89.004,100.065 ; K1.4@85.975,99.462 R5.1@88.924,100.415 ; K1.4@85.975,101.368 R5.1@88.924,100.415 ; K1.4@86.074,99.483 R5.1@89.004,100.765 ; K1.4@86.074,101.347 R5.1@89.004,100.065 ; R5.1@89.595,99.96 87.044,100.415 R5.1@89.595,100.87 ; R5.1@89.635,100.415 K1.4@85.825,100.415 ; K1.4@85.825,100.415 R5.1@89.004,100.065 ; K1.4@85.825,100.415 R5.1@89.004,100.765 ; K1.4@86.508,99.732 cw(c88.155,98.085) 88.155,100.415 ; K1.4@86.508,99.732 cw(c88.155,98.085) 88.155,100.415 ; K1.4@86.508,99.732 cw(c88.155,98.085) 88.155,100.415 ; K1.4@86.508,101.097 ccw(c88.155,102.745) 88.155,100.415 ; K1.4@86.508,101.097 ccw(c88.155,102.745) 88.155,100.415 ; K1.4@86.508,101.097 ccw(c88.155,102.745) 88.155,100.415 ; 88.531,100.415 cw(c88.531,99.311) R5.1@89.312,100.092 ; 88.531,100.415 ccw(c88.531,101.519) R5.1@89.312,100.738 ; 88.531,100.415 cw(c88.531,99.311) R5.1@89.312,100.092 ; 88.531,100.415 ccw(c88.531,101.519) R5.1@89.312,100.738 ; 88.531,100.415 ccw(c88.531,101.519) R5.1@89.312,100.738 ; 88.531,100.415 cw(c88.531,99.311) R5.1@89.312,100.092
  Bottom Layer w0.7: N27.7@65.297,40.091 C109.2@65.427,37.539 ; N27.7@65.298,40.039 C109.2@65.747,37.174 ; C108.2@65.427,34.645 66.39,33.71 ; C108.2@65.427,34.745 65.747,36.1 ; C109.2@65.427,37.439 65.747,36.1 ; C108.2@65.5,34.6 C108.2@65.747,34.353 ; C108.2@65.747,34.695 65.747,36.1 ; C108.2@65.8,34.3 C108.2@65.747,34.353 ; C109.2@65.8,37.9 71.6,37.9 ; N27.7@66.187,39.979 C109.2@65.427,37.539 ; N27.7@66.196,40.039 C109.2@65.747,37.174 ; 68.39,37.9 C109.2@65.427,37.539 ; R2.0@73.744,34.993 71.6,37.9 ; R2.0@74.267,35.464 71.6,37.9 ; R2.0@74.5,35.8 73.7,35.8 71.6,37.9 ; R2.0@74.549,35.814 71.6,37.9 ; R2.0@74.785,36.197 71.6,37.9 ; R2.0@75.055,36.847 71.6,37.9 ; 86.6,33.85 86.46,33.71 66.39,33.71 ; C109.2@65.427,37.539 N27.7@65.747,40.374 65.747,36.1 ; C109.2@65.427,37.539 65.747,40.074 C109.2@65.747,37.174 ; C108.2@65.747,34.353 66.39,33.71 ; 65.747,36.1 cw(c64.392,36.1) 65.215,35.023 ccw(c64.392,36.1) 65.747,36.1 ; 65.747,38.988 cw(c66.833,38.988) 66.065,39.756 ccw(c66.833,38.988) 65.747,38.988 ; 65.747,38.988 ccw(c64.661,38.988) 65.429,39.756 cw(c64.661,38.988) 65.747,38.988 ; C109.2@65.18,37.786 ccw(c63.809,39.157) 65.747,39.157 cw(c63.809,39.157) C109.2@65.18,37.786 ; C109.2@65.211,37.164 cw(c64.348,36.062) 65.747,36.062 ccw(c64.348,36.062) C109.2@65.211,37.164 ; C108.2@65.427,34.295 cw(c65.427,33.382) 66.072,34.028 ccw(c65.427,33.382) C108.2@65.427,34.295 ; C109.2@65.674,37.292 cw(c67.144,35.822) 67.144,37.9 ccw(c67.144,35.822) C109.2@65.674,37.292 ; C108.2@65.777,34.645 ccw(c66.554,34.645) 66.005,34.095 cw(c66.554,34.645) C108.2@65.777,34.645 ; 72.032,37.468 ccw(c73.589,39.025) 74.22,36.916 cw(c73.589,39.025) 72.032,37.468 ; 72.861,36.639 ccw(c73.971,37.748) 74.42,36.245 cw(c73.971,37.748) 72.861,36.639
  Bottom Layer w1: 65.747,36.1 74.2,36.1 R2.0@74.5,35.8 ; R2.0@74.376,34.829 70.025,36.1 ; R2.0@74.502,36.813 70.025,36.1 ; R2.0@74.549,35.814 70.025,36.1 ; 71.444,36.1 cw(c71.444,32.709) 73.842,35.107 ccw(c71.444,32.709) 71.444,36.1 ; 72.825,36.1 ccw(c72.825,37.538) 73.842,36.521 cw(c72.825,37.538) 72.825,36.1
  Bottom Layer w1.016: C18.2@69.95,100.415 C29.2@75.665,100.415 ; 89.056,33.85 ccw(c89.056,42.744) pad.0@95.345,36.455 ; pad.1@91.509,33.85 ccw(c91.509,40.291) pad.0@96.063,35.737 ; pad.1@91.981,36.729 86.961,33.85 ; pad.1@92.673,35.327 pad.1@91.195,33.85 ; pad.1@92.748,33.871 86.961,33.85 ; pad.1@93.962,33.85 ccw(c93.962,37.838) pad.0@96.782,35.018 ; pad.0@95.558,34.168 pad.1@93.159,36.712 ; pad.0@95.643,36.686 pad.1@92.337,33.873 ; pad.0@95.778,36.756 pad.1@91.235,33.85 ; pad.0@96.092,36.86 pad.1@92.55,35.35 ; pad.0@96.13,33.933 pad.1@92.55,35.35 ; pad.0@96.627,33.925 pad.1@91.235,33.85 ; pad.0@96.652,36.871 pad.1@93.159,36.712 ; pad.0@96.677,33.934 pad.1@92.337,33.873 ; pad.0@96.705,33.94 99.7,35.327 ; pad.0@96.769,36.846 99.7,35.327 ; 86.6,33.85 ccw(c86.6,39.77) 91.352,36.24 cw(c86.6,39.77) 86.6,33.85 ; 86.6,33.85 pad.1@91.195,33.85 ; 86.961,33.85 pad.1@92.55,35.35 ; pad.1@91.195,33.85 ccw(c91.195,38.332) 95.1,36.132 cw(c91.195,38.332) pad.1@91.195,33.85 ; pad.1@91.195,33.85 pad.0@98.223,33.85 ; pad.1@91.235,33.85 pad.0@96.4,35.4 ; pad.1@92.104,35.045 ccw(c94.37,36.595) pad.1@94.37,33.85 ; pad.1@92.104,35.045 ccw(c94.37,36.595) pad.1@94.37,33.85 ; pad.1@92.104,35.045 ccw(c94.37,36.595) pad.1@94.37,33.85 ; pad.1@92.337,33.873 pad.0@97.736,33.85 ; pad.1@92.337,33.873 pad.0@96.4,35.4 ; pad.1@92.55,35.35 pad.0@97.736,33.85 ; pad.1@92.55,35.35 pad.0@96.4,35.4 ; pad.1@92.943,35.619 ccw(c96.296,37.913) pad.0@96.296,33.85 ; pad.1@92.943,35.619 ccw(c96.296,37.913) pad.0@96.296,33.85 ; pad.1@92.943,35.619 ccw(c96.296,37.913) pad.0@96.296,33.85 ; pad.1@93.159,36.712 pad.0@97.736,33.85 ; pad.1@93.159,36.712 pad.0@96.4,35.4 ; pad.1@93.781,36.192 ccw(c98.222,39.231) pad.0@98.222,33.85 ; pad.1@93.781,36.192 ccw(c98.222,39.231) pad.0@98.222,33.85 ; pad.1@93.781,36.192 ccw(c98.222,39.231) pad.0@98.222,33.85 ; pad.0@96.4,35.4 99.7,35.327 ; pad.0@98.223,33.85 99.7,35.327 ; 86.414,33.85 ccw(c86.414,40.146) 91.374,36.269 cw(c86.414,40.146) 86.414,33.85 ; 88.498,33.85 ccw(c88.498,38.517) 92.175,35.643 cw(c88.498,38.517) 88.498,33.85 ; 88.621,33.85 ccw(c88.621,38.269) 92.168,35.634 cw(c88.621,38.269) 88.621,33.85 ; pad.1@90.581,33.85 ccw(c90.581,36.889) 92.975,35.017 cw(c90.581,36.889) pad.1@90.581,33.85 ; pad.1@90.641,33.85 ccw(c90.641,36.768) 92.983,35.028 cw(c90.641,36.768) pad.1@90.641,33.85 ; pad.1@92.934,33.85 ccw(c92.934,37.353) 95.985,35.634 cw(c92.934,37.353) pad.1@92.934,33.85 ; pad.0@94.672,33.85 ccw(c94.672,36.373) 96.871,35.135 cw(c94.672,36.373) pad.0@94.672,33.85
  Bottom Layer w1.27: v1(29.31,67.141) v1(32.485,67.141) v1(35.025,67.141) ; v1@35.1,67.141 v1(35.025,67.141) ; N13.E@37.2,61.2 37.3,61.2 35.025,63.475 ; N13.E@37.338,61.341 35.025,63.475 ; v1@44.9,67 36.7,67 36.559,67.141 v1(35.025,67.141) ; 50.3,67 46.303,63.003 44.621,63.003 42.219,65.405 35.23,65.405 35.025,65.2 ; v2@51.5,61 54.9,61 v2@55.55,60.35 ; v2@55.55,61 v2@55.55,60.35 ; C16.1@55.644,37.621 C15.1@57.803,37.621 ; C13.1@59.679,37.621 C15.1@57.803,37.621 ; C13.1@59.962,37.621 C15.1@57.803,37.621 ; 61.396,57.304 C11.1@64.897,53.848 64.852,53.848 58.9,59.8 56.1,59.8 v2@55.55,60.35 ; 35.025,63.475 35.025,65.2 ; 35.025,65.2 v1(35.025,67.141)
  Bottom Layer w4: pad.1@93.73,36.752 cw(c93.73,33.44) pad.0@96.4,35.4 ; 98.997,36.752 ccw(c98.997,33.582) pad.0@96.4,35.4 ; 104.657,38.82 ccw(c104.657,27.143) pad.0@96.4,35.4 ; 115.035,40.725 ccw(c111.153,44.607) XS2.4@116.104,46.979 ; pad.1@92.55,35.35 cw(c95.936,31.964) pad.0@95.936,36.752 ; pad.1@92.55,35.35 cw(c95.936,31.964) pad.0@95.936,36.752 ; pad.1@92.55,35.35 cw(c95.936,31.964) pad.0@95.936,36.752 ; pad.1@92.55,35.35 pad.1@92.673,35.327 ; pad.1@92.55,35.35 99.7,35.327 ; pad.1@92.55,35.35 99.552,36.752 ; pad.1@92.55,35.35 96.165,38.82 ; pad.1@92.55,35.35 pad.0@96.4,35.4 ; pad.1@92.55,35.35 pad.0@96.4,35.4 ; pad.1@92.55,35.35 pad.0@96.4,35.4 ; pad.1@92.55,35.35 pad.0@96.4,35.4 ; pad.1@92.673,35.327 99.7,35.327 ; pad.1@92.673,35.327 pad.1@94.098,36.752 ; pad.1@92.673,35.327 pad.0@96.4,35.4 ; pad.1@92.673,35.327 pad.0@96.4,35.4 ; pad.1@92.673,35.327 pad.0@96.4,35.4 ; pad.1@94.098,36.752 cw(c94.098,34.116) pad.0@96.4,35.4 ; pad.1@94.098,36.752 cw(c94.098,34.116) pad.0@96.4,35.4 ; pad.1@94.098,36.752 99.552,36.752 ; pad.1@94.098,36.752 96.165,38.82 ; pad.1@94.098,36.752 pad.0@96.4,35.4 ; pad.1@94.098,36.752 pad.0@96.4,35.4 ; pad.1@94.098,36.752 pad.0@96.4,35.4 ; 96.165,38.82 101.62,38.82 ; 96.165,38.82 pad.0@96.4,35.4 ; 96.165,38.82 pad.0@96.4,35.4 ; 96.165,38.82 pad.0@96.4,35.4 ; pad.0@96.4,35.4 cw(c99.552,32.403) 99.552,36.752 ; pad.0@96.4,35.4 ccw(c96.4,39.746) 99.473,36.673 ; pad.0@96.4,35.4 ccw(c96.4,39.746) 99.473,36.673 ; pad.0@96.4,35.4 cw(c101.62,33.127) 101.62,38.82 ; pad.0@96.4,35.4 ccw(c96.4,38.406) 98.525,36.28 cw(c96.4,38.406) pad.0@96.4,35.4 ; pad.0@96.4,35.4 cw(c101.62,33.127) 101.62,38.82 ; pad.0@96.4,35.4 cw(c99.552,32.403) 99.552,36.752 ; pad.0@96.4,35.4 ccw(c96.4,39.746) 99.473,36.673 ; pad.0@96.4,35.4 ccw(c96.4,39.746) 99.473,36.673 ; pad.0@96.4,35.4 101.62,38.82 ; pad.0@96.4,35.4 99.7,35.327 ; pad.0@96.4,35.4 99.552,36.752 ; pad.0@96.4,35.4 109.638,35.327 ; pad.0@96.4,35.4 99.7,35.327 ; pad.0@96.4,35.4 101.62,38.82 ; pad.0@96.4,35.4 99.552,36.752 ; pad.0@96.4,35.4 99.7,35.327 ; pad.0@96.4,35.4 99.552,36.752 ; 99.552,36.752 101.62,38.82 ; 99.7,35.327 109.638,35.327 ; 101.62,38.82 102.1,39.3 103.056,39.3 103.856,40.1 105.7,40.1 107.595,41.995 111.225,41.995 ; 101.62,38.82 108.05,38.82 111.225,41.995 ; 109.638,35.327 116.305,41.995 ; 110.753,44.553 cw(c116.305,39) XS2.4@116.305,46.852 ; 110.753,44.553 cw(c116.305,39) XS2.4@116.305,46.852 ; 110.753,44.553 cw(c116.305,39) XS2.4@116.305,46.852 ; 111.225,41.995 XS2.4@116.305,47.075 ; 113.7,47.5 115.88,47.5 XS2.4@116.305,47.075 ; 113.7,47.5 108.6,42.4 XS2.4@116.305,47.075 ; 113.7,47.5 XS2.4@116.305,47.075 ; 113.7,47.5 XS2.4@116.305,47.075 ; XS2.4@116.148,46.918 cw(c112.702,43.472) 117.575,43.472 ; XS2.4@116.148,46.918 cw(c112.702,43.472) 117.575,43.472 ; XS2.4@116.148,46.918 cw(c112.702,43.472) 117.575,43.472 ; 116.305,41.995 117.575,43.265 ; 116.305,41.995 XS2.4@116.305,47.075 ; 116.305,41.995 XS2.4@116.305,47.075 ; XS2.4@116.305,47.075 117.575,45.805 117.575,43.265 ; XS2.4@116.305,47.075 117.575,43.265 ; XS2.4@116.305,47.075 117.575,43.265 ; 112.185,45.985 cw(c114.893,43.277) 116.227,46.866 ccw(c114.893,43.277) 112.185,45.985
  other v1: 44.804,67.014 50.3,67.8 44.55,100.415 47.09,100.415 54.71,100.542
  other v2: 57.9,37.8 40.2,38.4 55.6,60.8 51.5,61.1 54.6,66.3 52.1,78.6 54.5,83
  other v3: 24.5,35.8 57.4,70.6 49.9,78.5 54.1,78.6
  other v5: 32.104,95.462
  other v6: 44.6,78.6
  other v7: 32.5,40
  other v10: 49,88.3 56.6,89.7
"I FAL": R50.2 XS5.1 | length 25.1
  Top Layer w0.61: XS5.1@17.626,92.668 19.068,92.668 ; XS5.1@17.729,92.133 19.068,92.668 ; XS5.1@17.729,93.203 19.068,92.668 ; R50.2@23.437,95.006 21.735,95.335 ; R50.2@23.437,95.664 21.735,95.335 ; R50.2@23.468,95.335 21.735,95.335 ; R50.2@23.595,95.335 21.735,95.335 ; XS5.1@18.012,92.282 cw(c18.942,91.352) 18.942,92.668 ; XS5.1@18.012,92.282 cw(c18.942,91.352) 18.942,92.668 ; XS5.1@18.012,92.282 cw(c18.942,91.352) 18.942,92.668 ; XS5.1@18.012,93.054 ccw(c18.942,93.984) 18.942,92.668 ; XS5.1@18.012,93.054 ccw(c18.942,93.984) 18.942,92.668 ; XS5.1@18.012,93.054 ccw(c18.942,93.984) 18.942,92.668 ; 19.068,92.668 21.735,95.335 ; 22.671,95.335 cw(c22.671,94.538) R50.2@23.235,95.102 ; 22.671,95.335 ccw(c22.671,96.132) R50.2@23.235,95.568 ; 22.671,95.335 cw(c22.671,94.538) R50.2@23.235,95.102 ; 22.671,95.335 ccw(c22.671,96.132) R50.2@23.235,95.568 ; 22.671,95.335 ccw(c22.671,96.132) R50.2@23.235,95.568 ; 22.671,95.335 cw(c22.671,94.538) R50.2@23.235,95.102
IF: C23.1 F1.4 R2.1 R28.1 R38.2 R58.2 | length 139.7
  Top Layer w0.61: R58.2@42.645,61.045 R38.2@45.185,61.045 ; R58.2@42.667,60.716 45.109,61.045 R58.2@42.667,61.374 ; R38.2@45.137,60.845 R58.2@42.737,61.365 ; R38.2@45.137,61.245 R58.2@42.737,60.725 ; R38.2@45.163,60.716 42.721,61.045 R38.2@45.163,61.374 ; R38.2@45.185,60.918 R58.2@42.737,60.725 ; R38.2@45.185,61.172 R58.2@42.737,61.365 ; R38.2@45.189,60.588 R58.2@42.737,60.725 ; R38.2@45.189,61.502 R58.2@42.737,61.365 ; R58.2@42.878,60.812 cw(c43.442,60.248) 43.442,61.045 ; R58.2@42.878,60.812 cw(c43.442,60.248) 43.442,61.045 ; R58.2@42.878,60.812 cw(c43.442,60.248) 43.442,61.045 ; R58.2@42.878,61.278 ccw(c43.442,61.842) 43.442,61.045 ; R58.2@42.878,61.278 ccw(c43.442,61.842) 43.442,61.045 ; R58.2@42.878,61.278 ccw(c43.442,61.842) 43.442,61.045 ; 44.388,61.045 cw(c44.388,60.248) R38.2@44.952,60.812 ; 44.388,61.045 ccw(c44.388,61.842) R38.2@44.952,61.278 ; 44.388,61.045 cw(c44.388,60.248) R38.2@44.952,60.812 ; 44.388,61.045 ccw(c44.388,61.842) R38.2@44.952,61.278 ; 44.388,61.045 ccw(c44.388,61.842) R38.2@44.952,61.278 ; 44.388,61.045 cw(c44.388,60.248) R38.2@44.952,60.812
  Top Layer w1: R58.2@42.4,60.9 42.441,60.859 C23.1@42.441,57.458 ; R58.2@42.9,60.8 v3(44,60.8) ; R38.2@44.7,60.8 v3(44,60.8) ; R38.2@45.185,60.918 v3(44,60.8) ; v6(57,53.7) 59.4,53.7 59.8,53.3 ; 59.713,53.387 60.9,52.2 65.2,52.2 66.472,50.928 70.103,50.928 F1.4@75.311,45.72 77.28,45.72 ; F1.4@75.454,44.984 77.28,45.72 ; F1.4@75.454,46.456 77.28,45.72 ; F1.4@75.841,45.19 cw(c77.122,43.909) 77.122,45.72 cw(c77.122,47.531) F1.4@75.841,46.25 ; R2.1@79.559,35.958 80.7,40.319 ; R2.1@79.842,36.521 ccw(c77.77,38.593) 80.7,38.593 ; R2.1@80.549,35.814 80.7,40.319 ; R2.1@80.6,35.8 80.7,35.9 80.7,42.3 77.28,45.72 ; 80.7,37.864 ccw(c82.599,37.864) R2.1@81.256,36.521 ; R2.1@81.546,35.892 80.7,40.319 ; C23.1@42.441,57.458 42.5,55.3 42.5,57.9 R28.1@42.418,55.245 C23.1@42.441,57.458 ; C23.1@42.441,57.458 42.645,60.918 v3(44,60.8) ; 74.031,47 cw(c72.75,45.72) 74.561,45.72 ccw(c72.75,45.72) 74.031,47 ; 74.031,47 ccw(c75.311,48.281) 75.311,46.47 cw(c75.311,48.281) 74.031,47 ; 42.441,60.1 cw(c43.463,60.1) 42.74,60.823 ccw(c43.463,60.1) 42.441,60.1
  Bottom Layer w1: v3@43.9,60.8 v3(44,60.8) 44.1,60.9 49.1,60.9 50.9,59.1 54.3,59.1 55.7,57.7 55.7,55 v6(57,53.7)
"IF OUT": R57.1 XS5.2 | length 72.9
  Top Layer w0.61: XS5.2@17.167,90.507 15.433,87.935 ; XS5.2@18.005,89.669 15.433,87.935 ; 28.244,60.147 27.101,61.29 21.41,61.29 20.512,62.188 17.062,62.188 15.35,63.9 15.35,87.852 XS5.2@17.626,90.128 15.433,87.935 ; 28.3,60.1 31.685,60.1 31.744,60.159 32.503,60.159 34.879,62.535 38.615,62.535 R57.1@40.105,61.045 ; 16.61,89.112 cw(c17.626,88.096) XS5.2@17.626,89.533 ; 16.61,89.112 ccw(c15.594,90.128) XS5.2@17.031,90.128 ; 16.61,89.112 cw(c17.626,88.096) XS5.2@17.626,89.533 ; 16.61,89.112 ccw(c15.594,90.128) XS5.2@17.031,90.128 ; 16.61,89.112 ccw(c15.594,90.128) XS5.2@17.031,90.128 ; 16.61,89.112 cw(c17.626,88.096) XS5.2@17.626,89.533 ; 39.325,61.825 ccw(c40.105,62.606) 40.105,61.502 cw(c40.105,62.606) 39.325,61.825
K1: C29.1 K1.5 V3.K V15.K | length 58.9
  Top Layer w1.016: V15.K@65.759,96.605 68.299,96.605 69.569,97.875 C29.1@75.411,97.875 ; 71.83,97.875 C29.1@75.665,97.875 79.856,97.875 V3.K@81.126,96.605 ; 84.482,94.138 V3.K@81.126,96.605 ; K1.5@85.245,92.3 82.4,96.22 K1.5@86.32,93.375 ; K1.5@85.825,92.795 82.015,96.605 ; V3.K@81.126,96.343 cw(c81.126,93.564) 83.091,95.529 ; V3.K@81.126,96.343 cw(c81.126,93.564) 83.091,95.529 ; V3.K@81.126,96.343 cw(c81.126,93.564) 83.091,95.529 ; V3.K@81.126,96.605 82.015,96.605 ; V3.K@81.126,96.605 82.015,96.605 ; 84.524,94.096 cw(c83.223,92.795) K1.5@85.063,92.795 ; 84.524,94.096 ccw(c85.825,95.397) K1.5@85.825,93.557 ; 84.524,94.096 cw(c83.223,92.795) K1.5@85.063,92.795 ; 84.524,94.096 ccw(c85.825,95.397) K1.5@85.825,93.557 ; 84.524,94.096 ccw(c85.825,95.397) K1.5@85.825,93.557 ; 84.524,94.096 cw(c83.223,92.795) K1.5@85.063,92.795 ; V3.K@81.239,96.369 cw(c81.702,95.403) 82.459,96.161 ccw(c81.702,95.403) V3.K@81.239,96.369
"LD DR+": R23.2 XS4.1 | length 38.8
  Top Layer w0.61: XS4.1@17.351,76.629 20.209,77.979 ; XS4.1@17.626,76.158 20.209,77.979 ; XS4.1@17.977,75.741 20.209,77.979 ; XS4.1@18.388,76.158 R23.2@23.595,81.365 ; R23.2@23.213,81.575 21.667,79.437 ; R23.2@23.468,81.365 21.667,79.437 ; R23.2@23.695,81.125 21.667,79.437 ; XS4.1@17.626,76.094 ccw(c17.626,77.778) 18.817,76.587 ; XS4.1@17.626,76.094 ccw(c17.626,77.778) 18.817,76.587 ; XS4.1@17.626,76.094 ccw(c17.626,77.778) 18.817,76.587 ; XS4.1@17.626,76.703 ccw(c17.626,79.859) 19.858,77.628 ; XS4.1@17.626,76.703 ccw(c17.626,79.859) 19.858,77.628 ; XS4.1@17.626,76.703 ccw(c17.626,79.859) 19.858,77.628 ; 22.815,80.585 ccw(c22.034,81.365) R23.2@23.138,81.365 ; 22.815,80.585 ccw(c22.034,81.365) R23.2@23.138,81.365 ; 22.815,80.585 ccw(c22.034,81.365) R23.2@23.138,81.365